# EAGLE board display (EAGLE 9.6.2)
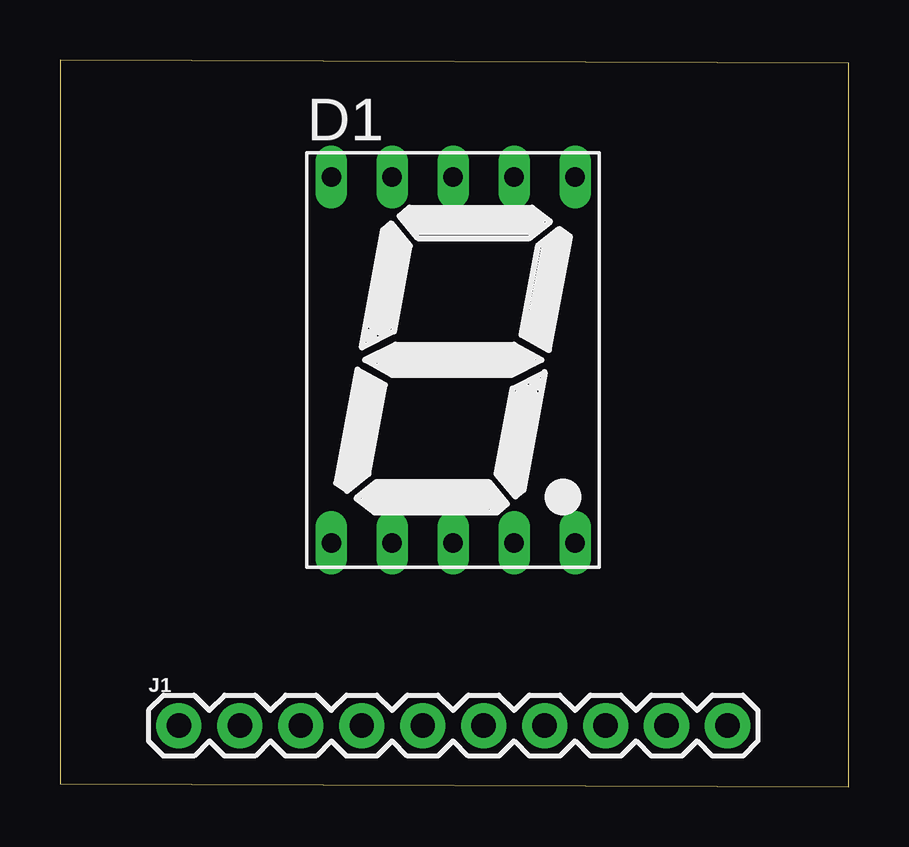
[diagram p0: board, top side]
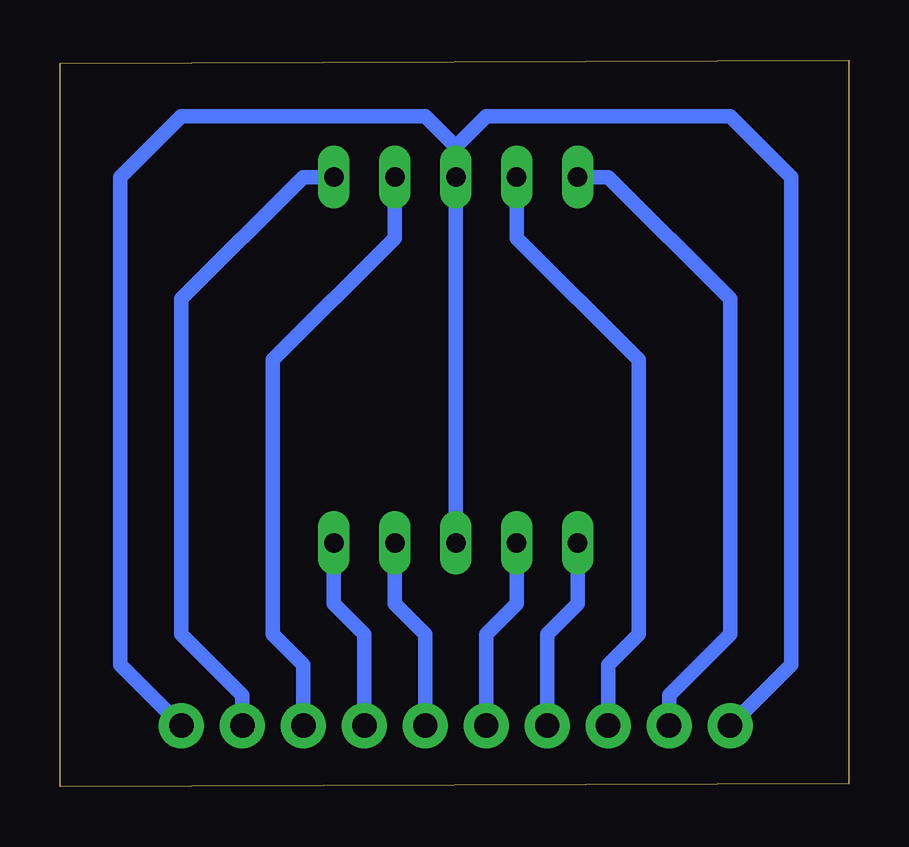
[diagram p1: board, bottom side, seen from below]

Size 32.87 x 30.28 mm. Coordinates in mm from the lower left corner, seen from the top.
Outline: 0,0.13 32.87,0 32.87,30.15 0,30.28 0,0.13
Copper layers (1*16): Top 0.035mm / dielectric 1.5mm / Bottom 0.035mm
Design rules "default": minimum track width 6mil, minimum drill 0.35mm, track to track 6mil, track to pad 6mil, pad to pad 6mil, via to via 6mil, smd to smd 6mil, copper to edge 40mil, drill to drill 6mil, minimum pad ring 10mil, minimum via ring 8mil, stop-mask expansion 4mil, vias tented up to drill 0mil, thermal gap 10mil

## Footprints (pad centres in the part's own frame; a part is rotated, then mirrored left to right if it is on the bottom)
7SEG-13 = drill 0.813 long: 1 -5.08,-7.62; 2 -2.54,-7.62; 3 0,-7.62; 4 2.54,-7.62; 5 5.08,-7.62; 6 5.08,7.62; 7 2.54,7.62; 8 0,7.62; 9 -2.54,7.62; 10 -5.08,7.62
1X10 = drill 1.016 pad 1.88: 1 0,0; 2 2.54,0; 3 5.08,0; 4 7.62,0; 5 10.16,0; 6 12.7,0; 7 15.24,0; 8 17.78,0; 9 20.32,0; 10 22.86,0

## Placement (x,y rotation side)
D1  [7SEG-13]  16.38,17.78 0 top
J1  [1X10]  4.95,2.54 0 top

## Library data of the parts
D1 = special
J1 = SparkFun-Connectors; PROD_ID: CONN-11563

## Nets
N$1: D1.3 D1.8 J1.1 J1.10
N$3: D1.7 J1.8
N$4: D1.6 J1.9
N$5: D1.4 J1.6
N$6: D1.2 J1.5
N$7: D1.1 J1.4
N$8: D1.9 J1.3
N$9: D1.10 J1.2
N$10: D1.5 J1.7

## Tracks (layer width: path | path; a pad name or v marks a point on that pad's centre or on a via)
N$1
  Bottom 0.61: D1.3 D1.8 16.38,26.67 | 16.38,26.67 17.65,27.94 27.81,27.94 30.35,25.4 30.35,5.08 J1.10 | J1.1 2.41,5.08 2.41,25.4 4.95,27.94 15.11,27.94 16.38,26.67
N$3
  Bottom 0.61: J1.8 22.73,5.08 24,6.35 24,17.78 18.92,22.86 D1.7
N$4
  Bottom 0.61: D1.6 22.73,25.4 27.81,20.32 27.81,6.35 25.27,3.81 J1.9
N$5
  Bottom 0.61: D1.4 18.92,7.62 17.65,6.35 J1.6
N$6
  Bottom 0.61: D1.2 13.84,7.62 15.11,6.35 J1.5
N$7
  Bottom 0.61: D1.1 11.3,7.62 12.57,6.35 J1.4
N$8
  Bottom 0.61: D1.9 13.84,22.86 8.76,17.78 8.76,6.35 10.03,5.08 J1.3
N$9
  Bottom 0.61: D1.10 10.03,25.4 4.95,20.32 4.95,6.35 7.49,3.81 J1.2
N$10
  Bottom 0.61: D1.5 21.46,7.62 20.19,6.35 J1.7